# EAGLE board Board2 (EAGLE 9.3.2)
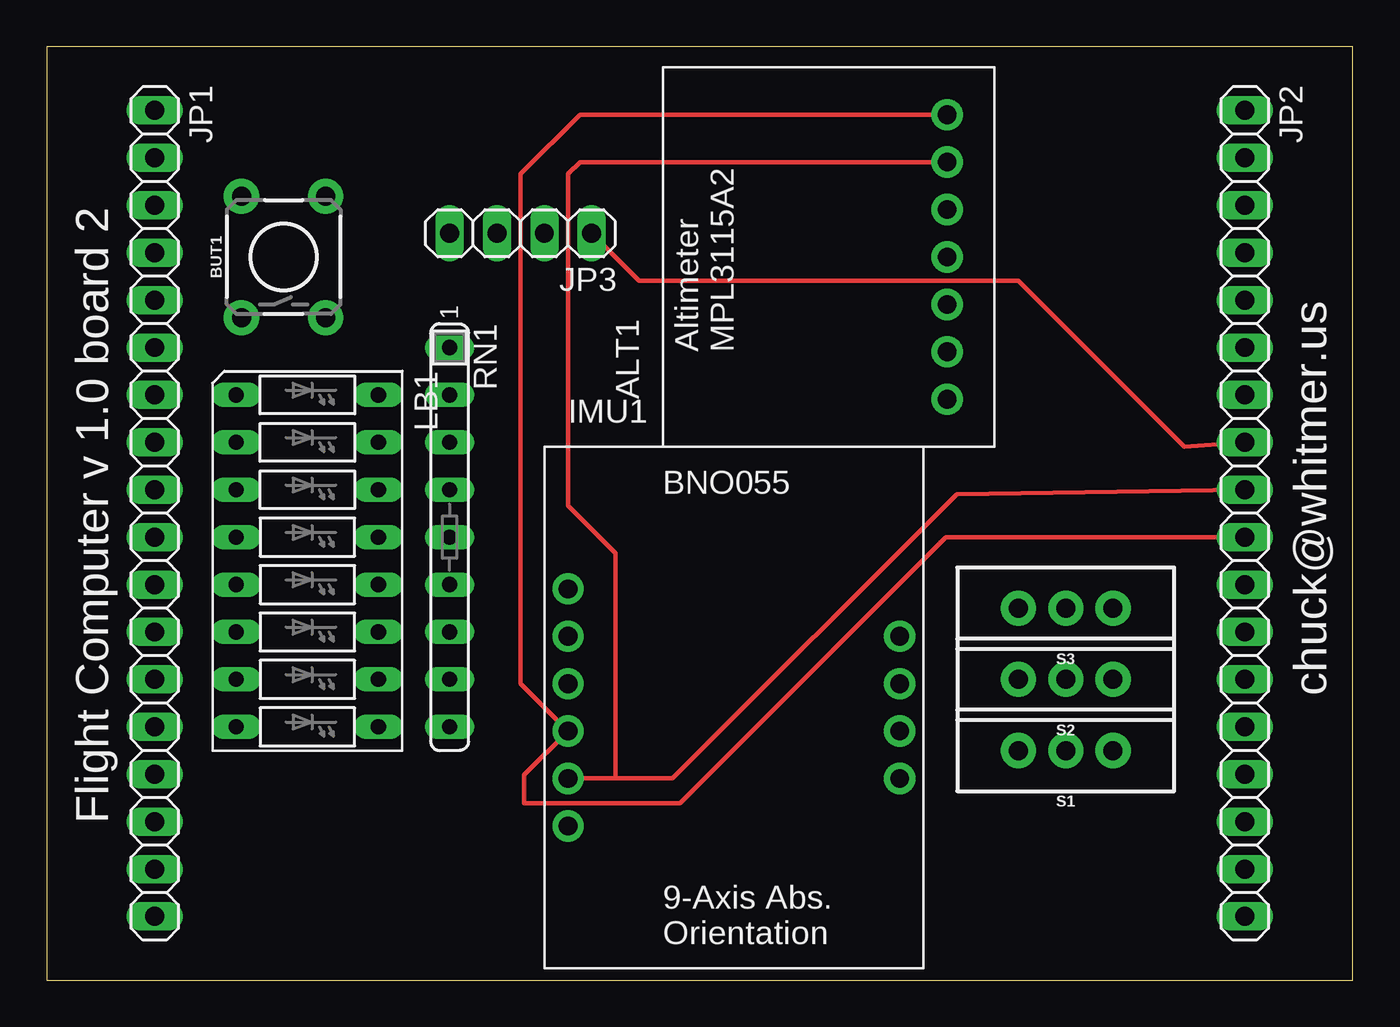
[diagram p0: board, top side]
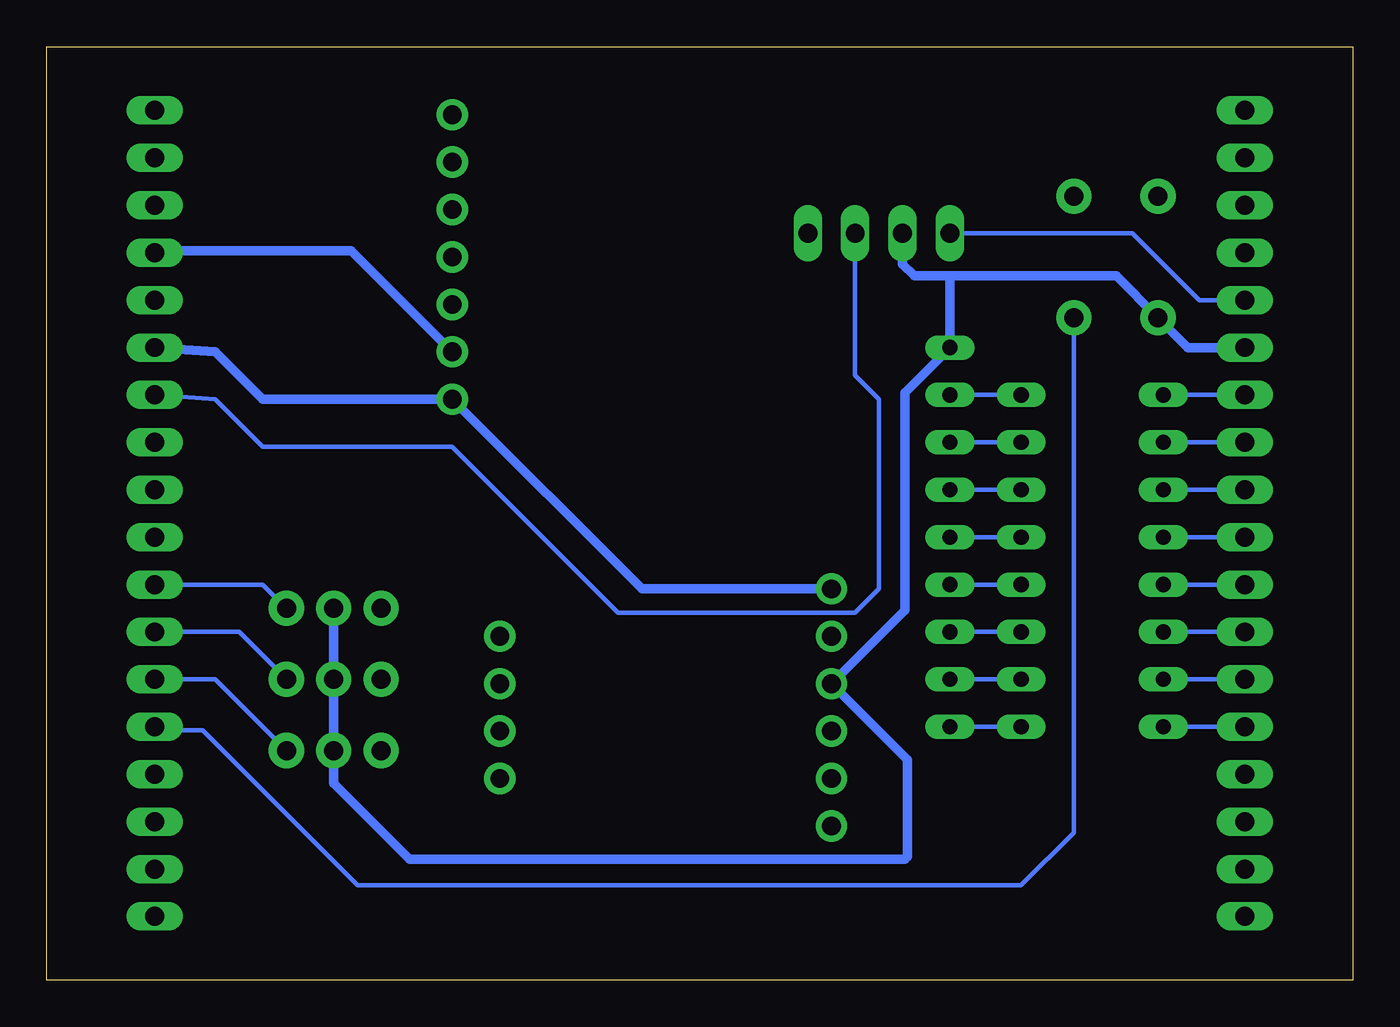
[diagram p1: board, bottom side, seen from below]

Size 70 x 50 mm. Coordinates in mm from the lower left corner, seen from the top.
Outline: 0,0 70,0 70,50 0,50 0,0
Copper layers (1*16): Top 0.035mm / dielectric 1.5mm / Bottom 0.035mm
Design rules "default": minimum track width 6mil, minimum drill 0.35mm, track to track 6mil, track to pad 6mil, pad to pad 6mil, via to via 6mil, smd to smd 6mil, copper to edge 40mil, drill to drill 6mil, minimum pad ring 10mil, minimum via ring 8mil, stop-mask expansion 4mil, vias tented up to drill 0mil, thermal gap 10mil

## Footprints (pad centres in the part's own frame; a part is rotated, then mirrored left to right if it is on the bottom)
ADA1893 = drill 1 pad 1.676: 3V -2.54,-6.35; GND -5.08,-6.35; INT1 2.54,-6.35; INT2 0,-6.35; SCL 5.08,-6.35; SDA 7.62,-6.35; VIN -7.62,-6.35
TACTILE_SWITCH_PTH_6.0MM = drill 1.016 pad 1.88: 1 -3.251,2.261; 2 3.251,2.261; 3 -3.251,-2.261; 4 3.251,-2.261
ADA2472 = drill 1 pad 1.676: 3V -8.89,3.81; ADR 8.89,-3.81; GND -8.89,1.27; INT 8.89,-1.27; PS0 8.89,3.81; PS1 8.89,1.27; RST -8.89,-6.35; SCL -8.89,-3.81; SDA -8.89,-1.27; VIN -8.89,6.35
1X18 = drill 1.016 long: 1 -21.59,0; 2 -19.05,0; 3 -16.51,0; 4 -13.97,0; 5 -11.43,0; 6 -8.89,0; 7 -6.35,0; 8 -3.81,0; 9 -1.27,0; 10 1.27,0; 11 3.81,0; 12 6.35,0; 13 8.89,0; 14 11.43,0; 15 13.97,0; 16 16.51,0; 17 19.05,0; 18 21.59,0
1X04 = drill 1.016 long: 1 -3.81,0; 2 -1.27,0; 3 1.27,0; 4 3.81,0
LB8 = drill 0.813 long: 1 -11.43,-3.81; 2 -8.89,-3.81; 3 -6.35,-3.81; 4 -3.81,-3.81; 5 -1.27,-3.81; 6 1.27,-3.81; 7 3.81,-3.81; 8 6.35,-3.81; 9 6.35,3.81; 10 3.81,3.81; 11 1.27,3.81; 12 -1.27,3.81; 13 -3.81,3.81; 14 -6.35,3.81; 15 -8.89,3.81; 16 -11.43,3.81
SIL9 = drill 0.813 long: 1 -10.16,0; 2 -7.62,0; 3 -5.08,0; 4 -2.54,0; 5 0,0; 6 2.54,0; 7 5.08,0; 8 7.62,0; 9 10.16,0
SWITCH_SPDT_PTH_11.6X4.0MM = drill 1.016 pad 1.88: 1 0,2.54; 2 0,0; 3 0,-2.54

## Placement (x,y rotation side)
ALT1  ADA1893  [ADA1893]  41.91,38.73 90 top
BUT1  MOMENTARY-SWITCH-SPST-PTH-6.0MM  [TACTILE_SWITCH_PTH_6.0MM]  12.7,38.73 90 top
IMU1  ADA2472  [ADA2472]  36.83,14.61 0 top
JP1  [1X18]  5.79,24.99 270 top
JP2  [1X18]  64.21,24.99 270 top
JP3  [1X04]  25.4,40.01 180 top
LB1  LB8  [LB8]  13.97,19.91 270 top
RN1  220  [SIL9]  21.59,23.72 270 top
S1  [SWITCH_SPDT_PTH_11.6X4.0MM]  54.61,12.29 90 top
S2  [SWITCH_SPDT_PTH_11.6X4.0MM]  54.61,16.1 90 top
S3  [SWITCH_SPDT_PTH_11.6X4.0MM]  54.61,19.91 90 top

## Library data of the parts
ALT1 IMU1 LB1 = cwParts
BUT1 = SparkFun-Switches; PROD_ID: SWCH-08441; SF_SKU: COM-00097
JP1-JP3 = pinhead
RN1 = resistor-sil; OC_FARNELL: unknown; OC_NEWARK: unknown
S1-S3 = SparkFun-Switches; PROD_ID: SWCH-08261; SF_SKU: COM-00102

## Nets
5V: ALT1.VIN IMU1.VIN JP2.6
A0: BUT1.3 JP2.14
A1: JP2.13 S1.3
A2: JP2.12 S2.3
A3: JP2.11 S3.3
A4: ALT1.SDA IMU1.SDA JP2.10
A5: ALT1.SCL IMU1.SCL JP2.9
A6: JP2.8 JP3.1
A7: JP2.7 JP3.2
D2: JP1.7 LB1.1
D9: JP1.14 LB1.8
GND1: BUT1.1 IMU1.GND JP1.6 JP3.3 RN1.1 S1.2 S2.2 S3.2
GND2: ALT1.GND JP2.4
N$1: IMU1.3V
N$2: JP1.8 LB1.2
N$3: JP1.9 LB1.3
N$4: JP1.10 LB1.4
N$5: JP1.11 LB1.5
N$6: JP1.12 LB1.6
N$7: JP1.13 LB1.7
N$8: ALT1.3V
N$9: LB1.16 RN1.2
N$10: LB1.15 RN1.3
N$11: LB1.14 RN1.4
N$12: LB1.13 RN1.5
N$13: LB1.12 RN1.6
N$14: LB1.11 RN1.7
N$15: LB1.10 RN1.8
N$16: LB1.9 RN1.9
RST: JP1.5 JP3.4

## Tracks (layer width: path | path; a pad name or v marks a point on that pad's centre or on a via)
5V
  Bottom 0.508: IMU1.VIN 38.1,20.95 ALT1.VIN 58.42,31.11 60.96,33.66 JP2.6
A0
  Bottom 0.254: JP2.14 63.4,13.39 61.65,13.39 53.34,5.08 17.78,5.08 14.96,7.9 BUT1.3
A1
  Bottom 0.254: JP2.13 60.96,16.1 S1.3
A2
  Bottom 0.254: JP2.12 59.69,18.64 S2.3
A3
  Bottom 0.254: JP2.11 58.42,21.18 S3.3
A4
  Top 0.254: 47.9,23.44 47.79,23.33 | 47.79,23.33 33.93,9.47 25.59,9.47 25.59,10.99 IMU1.SDA 25.4,15.88 25.4,43.18 28.57,46.35 ALT1.SDA | JP2.10 48.18,23.72 47.79,23.33
A5
  Top 0.254: 30.48,10.79 33.53,10.79 48.77,26.04 JP2.9 | 30.48,10.79 IMU1.SCL | ALT1.SCL 28.57,43.81 27.94,43.18 27.94,25.4 30.48,22.86 30.48,10.79
A6
  Top 0.254: JP3.1 31.75,37.47 52.07,37.47 60.96,28.57 JP2.8
A7
  Bottom 0.254: JP3.2 26.67,32.38 25.4,31.11 25.4,20.95 26.67,19.68 39.37,19.68 48.26,28.57 58.42,28.57 60.96,31.11 JP2.7
D2
  Bottom 0.254: JP1.7 LB1.1
D9
  Bottom 0.254: JP1.14 LB1.8
GND1
  Bottom 0.152: 23.88,6.6 24,6.48
  Bottom 0.508: JP1.6 8.84,33.88 BUT1.1 12.68,37.72 21.59,37.72 | JP3.3 24.13,38.35 23.5,37.72 21.59,37.72 | 21.59,37.72 RN1.1 24,31.47 24,19.81 IMU1.GND 23.88,11.81 23.88,6.6 | 24,6.48 50.55,6.48 54.61,10.54 S1.2 S2.2 S3.2
GND2
  Bottom 0.152: JP2.4 64.11,39.06
  Bottom 0.508: 64.11,39.06 53.67,39.06 ALT1.GND
N$2
  Bottom 0.254: JP1.8 LB1.2
N$3
  Bottom 0.254: JP1.9 LB1.3
N$4
  Bottom 0.254: JP1.10 LB1.4
N$5
  Bottom 0.254: JP1.11 LB1.5
N$6
  Bottom 0.254: JP1.12 LB1.6
N$7
  Bottom 0.254: JP1.13 LB1.7
N$9
  Bottom 0.254: LB1.16 RN1.2
N$10
  Bottom 0.254: RN1.3 LB1.15
N$11
  Bottom 0.254: LB1.14 RN1.4
N$12
  Bottom 0.254: RN1.5 LB1.13
N$13
  Bottom 0.254: LB1.12 RN1.6
N$14
  Bottom 0.254: RN1.7 LB1.11
N$15
  Bottom 0.254: LB1.10 RN1.8
N$16
  Bottom 0.254: RN1.9 LB1.9
RST
  Bottom 0.254: JP1.5 8.23,36.42 11.81,40.01 JP3.4

## Text on the board
tNames: chuck@whitmer.us | Flight Computer v 1.0 board 2